# Altium PCB Drone_v1.0 - Copy.PcbDoc
Units mm, origin at the board's own origin, x right, y up, seen from the top; angles counter-clockwise.
Board outline 103.38 x 103.38 mm, 2 copper layers (Top Layer, Bottom Layer); 82 components, 54 nets, 266 pads, 76 vias.
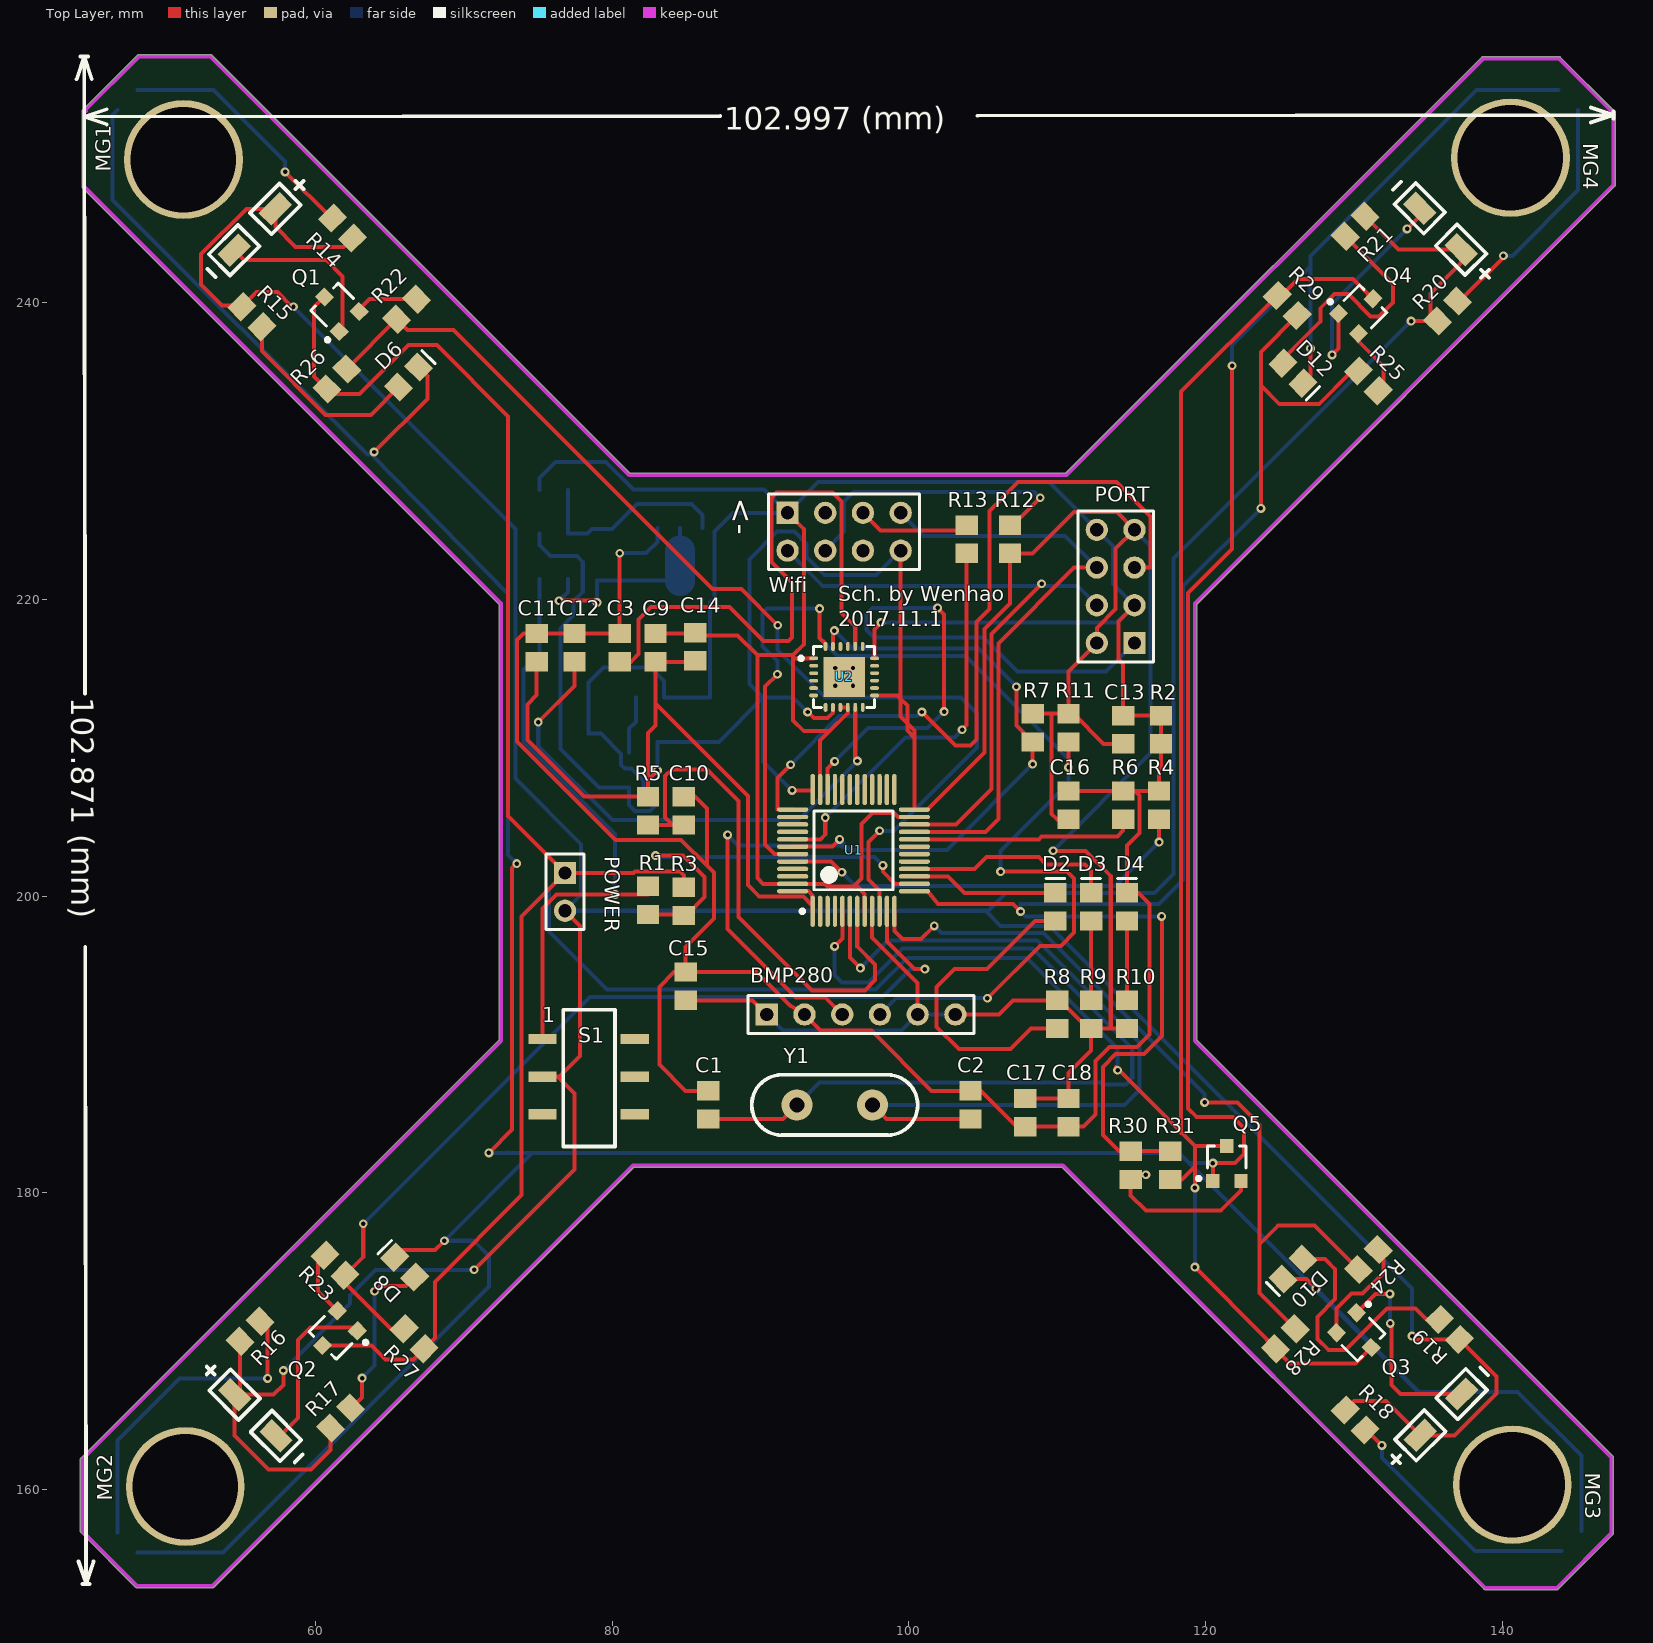
[diagram p0: Top Layer view]
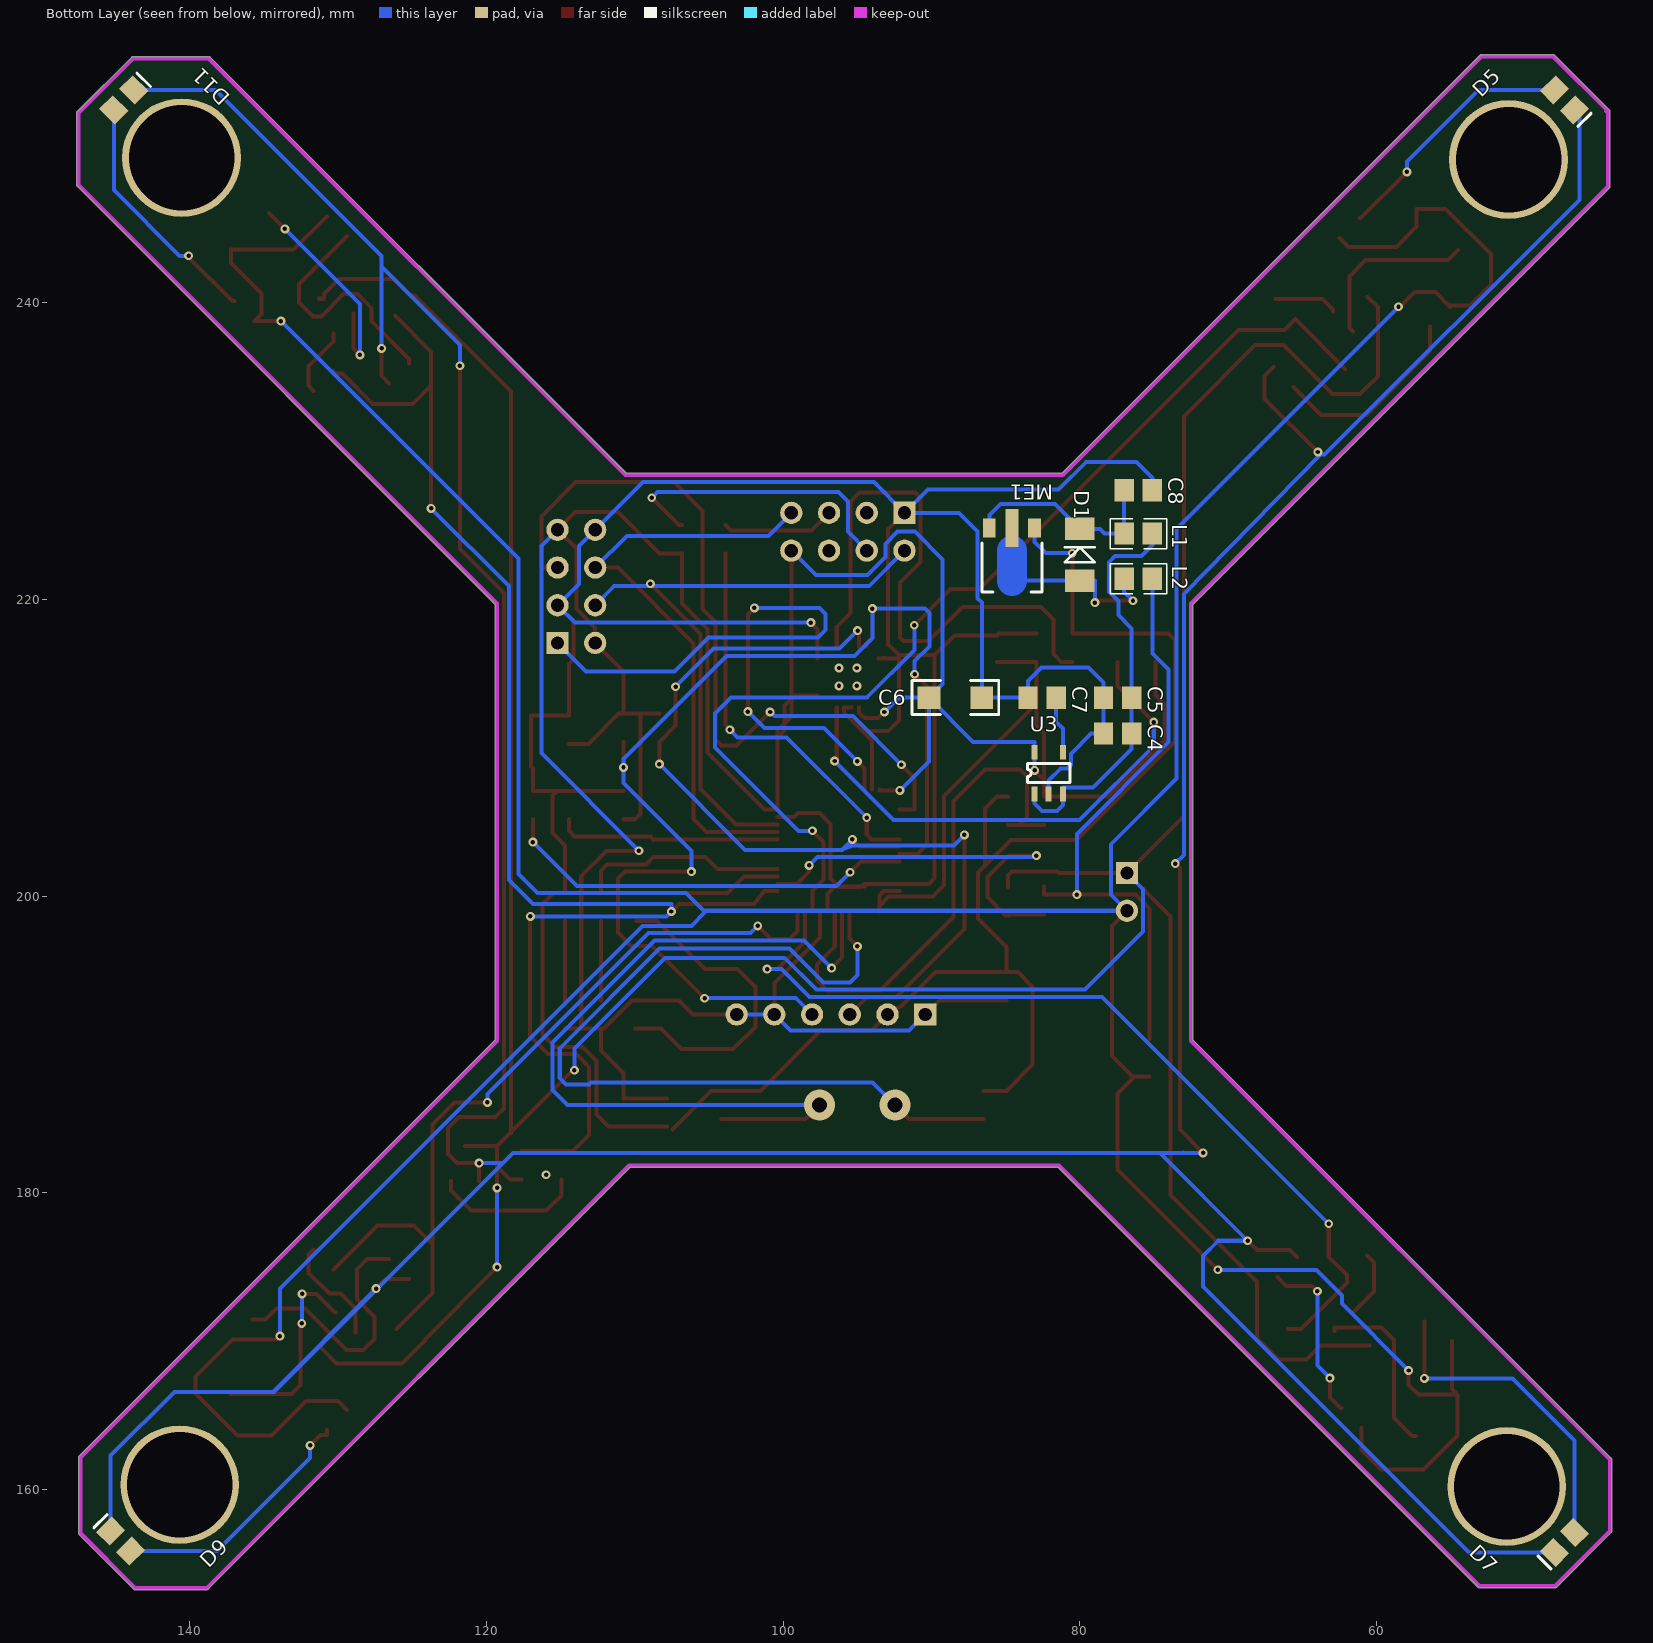
[diagram p1: Bottom Layer view, seen from below]

## Layer stack, top to bottom
Top Layer: signal copper 0.0356
Dielectric: dielectric 0.32, FR-4, Dk 4.8
Bottom Layer: signal copper 0.0356

## Board outline
47.916,153.453 44.233,157.136 44.233,157.135 cw(c44.323,157.226) 44.196,157.226 44.196,162.052 cw(c44.323,162.052) 44.233,162.143 44.233,162.142 72.39,190.299 72.39,219.657 44.36,247.687 44.36,247.686 cw(c44.45,247.777) 44.323,247.777 44.323,252.857 cw(c44.45,252.857) 44.36,252.948 44.36,252.947 48.043,256.63 48.042,256.63 cw(c48.133,256.54) 48.133,256.667 52.958,256.667 cw(c52.959,256.54) 53.049,256.63 81.206,228.473 110.564,228.473 138.594,256.503 138.593,256.503 cw(c138.684,256.413) 138.684,256.54 143.764,256.54 cw(c143.764,256.413) 143.855,256.503 143.854,256.503 147.537,252.82 147.537,252.821 cw(c147.447,252.73) 147.574,252.73 147.574,247.904 cw(c147.447,247.904) 147.537,247.813 147.537,247.814 119.38,219.657 119.38,190.299 147.41,162.269 147.41,162.27 cw(c147.32,162.179) 147.447,162.179 147.447,157.099 cw(c147.32,157.099) 147.41,157.008 147.41,157.009 143.727,153.326 143.728,153.326 cw(c143.637,153.416) 143.637,153.289 138.811,153.289 cw(c138.811,153.416) 138.721,153.326 110.31,181.737 81.46,181.737 53.176,153.453 53.177,153.453 cw(c53.086,153.543) 53.086,153.416 48.006,153.416 cw(c48.006,153.543)

## Design rules (kind name [scope] priority, off if disabled: settings)
Clearance [All] p1: gap=0.2
PolygonConnect [All] p1: connectstyle=Relief reliefconductorwidth=0.254 reliefentries=4 polygonreliefangle="90 Angle" airgapwidth=0.254
RoutingVias [All] p1: holewidth=0.711 width=1.27 viastyle="Through Hole" minholewidth=0.711 minwidth=1.27 maxholewidth=0.711 maxwidth=1.27
SolderMaskExpansion [All] p1: expansion=0.102
Width [All] p1: maxlimit=0.27 minlimit=0.27 preferedwidth=0.27 minimp=50.000000 maximp=50.000000 favimp=50.000000
28 further rules are at their usual default settings.

## Classes and differential pairs
component class Drone_v1.0: BMP280 C1 C2 C3 C4 C5 C6 C7 C8 C9 C10 C11 C12 C13 C14 D1 D2 D3 D4 D5 D6 D7 D8 D9 D10 Header L1 L2 ME1 MG1 MG2 MG3 MG4 P1 PORT PORT1 POWER Q1 Q2 Q3 Q4 Q5 R1 R2 R3 R4 R5 R6 R7 R8 R9 R10 R11 R12 R13 R14 R15 R16 R17 R18 R19 R20 R21 R22 R23 R24 R25 R26 R27 R28 S1 U1 U2 U3 Wifi Y1

## Components (designator, comment, footprint, x,y, rotation, side; value= is the part's Value field where it differs from the comment)
BMP280 "BMP280" HDR1X6 90.424,192.024 r0 top (schematic designator P1)
C1 "0402 12pF" 0805-2 86.487,185.928 r90 top
C2 "0402 12pF" 0805-2 104.14,185.928 r270 top
C3 "0402 12pF" 0805-2 80.518,216.728 r270 top
C4 "0402 12pF" 0805-2 77.47,210.947 r0 bottom
C5 "0402 12pF" 0805-2 77.47,213.36 r0 bottom
C6 "Cap Pol" 1206 88.392,213.36 r180 bottom
C7 "0402 12pF" 0805-2 82.55,213.36 r0 bottom
C8 "0402 12pF" 0805-2 76.073,227.33 r180 bottom
C9 "0402 12pF" 0805-2 82.931,216.728 r90 top
C10 "Cap" 0805-2 84.836,205.74 r90 top
C11 "0402 12pF" 0805-2 74.93,216.728 r90 top
C12 "0402 12pF" 0805-2 77.47,216.728 r90 top
C13 "Cap" 0805-2 114.427,211.201 r270 top
C14 "Cap" 0805-2 85.598,216.789 r270 top
C15 "Cap" 0805-2 84.963,193.929 r270 top
C16 "Cap" 0805-2 110.744,206.121 r270 top
C17 "0402 12pF" 0805-2 107.823,185.42 r270 top
C18 "0402 12pF" 0805-2 110.744,185.42 r270 top
D1 "Diode" DIODE-1206 80.01,221.234 r90 bottom
D2 "LED0" LED_0805 109.855,199.263 r90 top
D3 "LED0" LED_0805 112.268,199.263 r90 top
D4 "LED0" LED_0805 114.681,199.263 r90 top
D5 "LED0" LED_0805 47.371,253.619 r225 bottom
D6 "LED0" LED_0805 66.294,234.95 r45 top
D7 "LED0" LED_0805 47.371,156.464 r315 bottom
D8 "LED0" LED_0805 66.04,175.006 r135 top
D9 "LED0" LED_0805 144.617,156.555 r45 bottom
D10 "LED0" LED_0805 125.857,174.879 r225 top
D11 "LED0" LED_0805 144.399,253.619 r135 bottom
D12 "LED0" LED_0805 125.857,235.204 r315 top
L1 "Inductor" 0805-1 76.073,224.409 r180 bottom
L2 "Inductor" 0805-1 76.073,221.361 r180 bottom
ME1 "ME2108A" SOT-89 83.058,224.79 r0 bottom
MG1 "MOTOR AC" Motor 51.943,248.793 r315 top
MG2 "MOTOR AC" Motor 52.07,161.036 r45 top
MG3 "MOTOR AC" Motor 139.827,161.163 r135 top
MG4 "MOTOR AC" Motor 139.7,248.92 r225 top
PORT "PORT" HDR2X4_CEN 115.189,217.043 r90 top (schematic designator PORT1)
POWER "Header 2" HDR1X2 76.835,201.549 r270 top (schematic designator POWER1)
Q1 "SI2302" SOT-23 61.468,239.522 r45 top
Q2 "SI2302" SOT-23 61.341,170.561 r135 top
Q3 "SI2302" SOT-23 130.302,170.434 r225 top
Q4 "SI2302" SOT-23 130.429,239.395 r315 top
Q5 "MOSFET-N" SOT-23 121.412,181.991 r0 top
R1 "Res1" 0805-2 82.423,199.705 r90 top
R2 "Res1" 0805-2 116.967,211.201 r270 top
R3 "Res1" 0805-2 84.836,199.644 r90 top
R4 "Res1" 0805-2 116.84,206.121 r270 top
R5 "Res1" 0805-2 82.423,205.74 r90 top
R6 "Res1" 0805-2 114.427,206.121 r270 top
R7 "Res1" 0805-2 108.331,211.328 r270 top
R8 "Res1" 0805-2 109.982,192.024 r90 top
R9 "Res1" 0805-2 112.268,192.024 r270 top
R10 "Res1" 0805-2 114.681,192.024 r270 top
R11 "Res1" 0805-2 110.744,211.328 r270 top
R12 "Res1" 0805-2 106.807,224.028 r270 top
R13 "Res1" 0805-2 103.886,224.028 r90 top
R14 "Res1" 0805-2 61.849,244.983 r135 top
R15 "Res1" 0805-2 55.753,239.014 r315 top
R16 "Res1" 0805-2 55.626,170.688 r45 top
R17 "Res1" 0805-2 61.722,164.846 r45 top
R18 "Res1" 0805-2 130.048,164.719 r315 top
R19 "Res1" 0805-2 136.398,170.815 r135 top
R20 "Res1" 0805-2 136.271,239.395 r45 top
R21 "Res1" 0805-2 130.048,245.11 r225 top
R22 "Res1" 0805-2 66.167,239.522 r225 top
R23 "Res1" 0805-2 61.341,175.133 r315 top
R24 "Res1" 0805-2 130.937,175.514 r225 top
R25 "Res1" 0805-2 130.937,234.696 r135 top
R26 "Res1" 0805-2 61.468,234.823 r45 top
R27 "Res1" 0805-2 66.675,170.18 r135 top
R28 "Res1" 0805-2 125.349,170.18 r45 top
R29 "Res1" 0805-2 125.476,239.776 r315 top
R30 "Res1" 0805-2 114.935,181.864 r90 top
R31 "Res1" 0805-2 117.602,181.864 r90 top
S1 "Switch" 开关 76.708,183.134 r0 top
U1 "STM32F103C" LQFP-48_M 96.266,203.073 r90 top
U2 "MPU6050" QFN50P400X400X90-24N 95.631,214.757 r0 top
U3 "MIC5219" SOT25-5 83.058,206.883 r90 bottom
Wifi "ESP03" PCBComponent_1 91.821,223.266 r0 top (schematic designator Header1)
Y1 "Micro 3215" XTAL5 92.456,185.928 r0 top

## Footprints (in the part's own frame and the unit in brackets; to place one, negate y for a bottom-side part, rotate by r counter-clockwise, add the part's x,y. Pads: shape width x height; smd on the part's side, far side on the other; paste and mask are expansions set on the pad)
0805-1 [mm] "贴片带丝印"
  rect 1.3x1.5 smd: 1(-0.95,0) 2(0.95,0)
  silkscreen extent -1.91,-1.02 1.9,1.02, body extent -1.14,-0.51 1.14,0.51, height 1
0805-2 [mm] "贴片无丝印"
  rect 1.3x1.5 smd: 1(-0.95,0) 2(0.95,0)
1206 [mil] "贴片元件"
  rect 60x60 smd: 1(-70,0) 2(70,0)
  silkscreen extent -115,-45 115,45, body extent -75,-35 75,35, height 39
DIODE-1206 [mm] "玻璃封装二极管"
  rect 1.5x2 smd: 1(0,0) 2(3.5,0)
  silkscreen extent 1.25,-1 2.25,1
HDR1X2 [mm] "Connector; Header; 2 Position"
  rect 1.5x1.5 hole 0.9: 1(0,0)
  round 1.5 hole 0.9: 2(2.54,0)
  silkscreen extent -1.27,-1.27 3.81,1.27
HDR1X6 [mm] "Connector; Header; 6 Position"
  rect 1.5x1.5 hole 0.9: 1(0,0)
  round 1.5 hole 0.9: 2(2.54,0) 3(5.08,0) 4(7.62,0) 5(10.16,0) 6(12.7,0)
  silkscreen extent -1.27,-1.27 13.97,1.27
HDR2X4_CEN [mm] "Connector; Header; 4x2 Position"
  rect 1.5x1.5 hole 0.9: 1(0,0)
  round 1.5 hole 0.9: 2(2.54,0) 3(5.08,0) 4(7.62,0) 5(0,2.54) 6(2.54,2.54) 7(5.08,2.54) 8(7.62,2.54)
  silkscreen extent -1.27,-1.27 8.89,3.81
LED_0805 [mm] "贴片二极管"
  rect 1.3x1.5 smd: 1(-0.95,0) 2(0.95,0)
  silkscreen extent 1.91,-0.63 1.91,0.64
LQFP-48_M [mm] "Thin QFP, 48-Leads, Body 7x7mm, Pitch 0.5mm, IPC Low Density"
  oval 2.1x0.3 smd: 1(-4.1,2.75) 2(-4.1,2.25) 3(-4.1,1.75) 4(-4.1,1.25) 5(-4.1,0.75) 6(-4.1,0.25) 7(-4.1,-0.25) 8(-4.1,-0.75) 9(-4.1,-1.25) 10(-4.1,-1.75) 11(-4.1,-2.25) 12(-4.1,-2.75) 25(4.1,-2.75) 26(4.1,-2.25) 27(4.1,-1.75) 28(4.1,-1.25) 29(4.1,-0.75) 30(4.1,-0.25) 31(4.1,0.25) 32(4.1,0.75) 33(4.1,1.25) 34(4.1,1.75) 35(4.1,2.25) 36(4.1,2.75)
  oval 0.3x2.1 smd: 13(-2.75,-4.1) 14(-2.25,-4.1) 15(-1.75,-4.1) 16(-1.25,-4.1) 17(-0.75,-4.1) 18(-0.25,-4.1) 19(0.25,-4.1) 20(0.75,-4.1) 21(1.25,-4.1) 22(1.75,-4.1) 23(2.25,-4.1) 24(2.75,-4.1) 37(2.75,4.1) 38(2.25,4.1) 39(1.75,4.1) 40(1.25,4.1) 41(0.75,4.1) 42(0.25,4.1) 43(-0.25,4.1) 44(-0.75,4.1) 45(-1.25,4.1) 46(-1.75,4.1) 47(-2.25,4.1) 48(-2.75,4.1)
  silkscreen extent -4.22,-2.65 2.65,3.57, body extent -3.5,-3.5 3.5,3.5, height 1.6
Motor [mm]
  round 8 hole 7.1: 0(-1.143,0)
  rect 1.2x2 smd: 1(5.588,2.032) 2(5.588,-1.905)
  silkscreen extent 4.57,-4.06 6.6,4.7
PCBComponent_1 [mm]
  rect 1.5x1.5 hole 0.9: 1(0,2.54)
  round 1.5 hole 0.9: 2(2.54,2.54) 3(5.08,2.54) 4(7.62,2.54) 5(7.62,0) 6(5.08,0) 7(2.54,0) 8(0,0)
  silkscreen extent -1.27,-1.27 8.89,3.81
QFN50P400X400X90-24N [mm] "QFN, 24-Leads, Body 4.1x4.1mm (max), Pitch 0.50mm, IPC Medium Density"
  oval 0.6x0.25 smd: 1(-2.05,1.25) 2(-2.05,0.75) 3(-2.05,0.25) 4(-2.05,-0.25) 5(-2.05,-0.75) 6(-2.05,-1.25) 13(2.05,-1.25) 14(2.05,-0.75) 15(2.05,-0.25) 16(2.05,0.25) 17(2.05,0.75) 18(2.05,1.25)
  oval 0.25x0.6 smd: 7(-1.25,-2.05) 8(-0.75,-2.05) 9(-0.25,-2.05) 10(0.25,-2.05) 11(0.75,-2.05) 12(1.25,-2.05) 19(1.25,2.05) 20(0.75,2.05) 21(0.25,2.05) 22(-0.25,2.05) 23(-0.75,2.05) 24(-1.25,2.05)
  rect 2.8x2.7 smd: 25(0,0)
  silkscreen extent -3.02,-2.05 2.05,2.05, body extent -2.05,-2.05 2.05,2.05, height 0.9
SOT25-5 [mm]
  rect 1x0.4 smd: 1(0,0) 2(0,-0.95) 3(0,-1.9) 4(2.8,-1.9) 5(2.8,0)
  silkscreen extent 0.76,-2.38 2.03,0.48
SOT-23 [mm]
  rect 0.9x0.95 smd: 1(-0.95,-1.175) 2(0.95,-1.175) 3(0,1.175)
  silkscreen extent -2.03,-1.14 1.3,1.18
SOT-89 [mil]
  rect 34x50 smd: 1(0,0) 3(120,0)
  rect 34x100 smd: 2(60,0)
  Top Layer lines w80: 60,140 60,60
  silkscreen extent -20,40 140,170
XTAL5 [mm]
  round 2.1 hole 1: 1(0,0) 2(5.08,0)
  silkscreen extent -3.05,-2.03 8.13,2.03
开关 [mm]
  rect 1.9x0.7 smd: 1(-1.397,7.239) 2(-1.397,4.699) 3(-1.397,2.159) 4(4.826,7.239) 5(4.826,4.699) 6(4.826,2.159)
  silkscreen extent 0,0 3.5,9.2

## Part data
BMP280: library part "Header 6", "Header, 6-Pin"
C1 C2 C3 C4 C5 C7 C8 C9 C11 C12 C17 C18: library part Cap, "Capacitor"
C6: "极性电解电容"
C10 C13 C14 C15 C16: "无极性电容"
D1: "二极管"
D2 D3 D4 D5 D6 D7 D8 D9 D10 D11 D12: "发光二极管"
L1 L2: "电感"
PORT: library part "Header 4X2A", "Header, 4-Pin, Dual row"
POWER: "Header, 2-Pin"
Q1 Q2 Q3 Q4: library part MOSFET-N, "N-Channel MOSFET"
Q5: "N-Channel MOSFET"
R1 R2 R3 R4 R5 R6 R7 R8 R9 R10 R11 R12 R13 R14 R15 R16 R17 R18 R19 R20 R21 R22 R23 R24 R25 R26 R27 R28 R29 R30 R31: "贴片电阻"
S1: library part 双刀双柄开关
U1: "STM32单片机48引脚"
Wifi: library part Hearder
Y1: library part XTAL, "Crystal Oscillator"

## Via types
v1: diameter 0.6, hole 0.3, Top Layer to Bottom Layer, 72 vias
v2: diameter 0.6, hole 0.3, Top Layer to Bottom Layer, tented top, 4 vias

## Nets (pads, with @x,y where several pads share a name; then routed paths per layer and width w, separated by ;. In a path a pad name is that pad's centre, name@x,y a point inside that pad or via, vN(x,y) a via of type N, cw(c..) or ccw(c..) an arc to the next point about the centre after c; other vN are vias at no path point)
3V3: BMP280.1 BMP280.5 BMP280.6 C6.1 C9.1 C11.1 C13.2 C14.2 C15.2 C16.2 C17.1 C18.1 PORT.4 PORT.5 R5.2 R7.1 R8.2 R9.2 R10.2 R11.1 R12.2 U1.1 U1.9 U1.24 U1.36 U1.48 U2.8 U2.13 U3.5 Wifi.5 | length 268.7
  Top Layer w0.27: C11.1 74.93,213.543 74.295,212.908 74.295,210.51 78.115,206.69 R5.2 82.423,207.823 ; v1(83.058,208.458) 82.423,207.823 ; C15.2 89.469,192.979 BMP280.1 ; C14.2@85.598,215.778 C9.1 82.931,212.954 ; v1(92.126,207.112) 93.516,207.112 U1.36 ; U1.48 93.218,200.323 93.516,200.025 U1.1@93.516,199.339 ; v1(93.167,212.395) 93.587,211.975 94.512,211.975 94.881,212.344 U2.8 ; U1.1 U1.1@93.516,199.339 ; U1.9 97.516,197.195 100.584,194.127 BMP280.5 ; U2.13 99.218,213.507 99.441,213.284 ; Wifi.5 99.441,213.284 ; U1.24 U1.24@100.381,205.823 ; BMP280.6 106.07,192.024 107.02,192.974 R8.2 110.16,192.974 112.06,191.074 R9.2 ; C17.1 C18.1 110.744,188.087 112.268,189.611 R9.2 ; R7.1 R11.1 ; 109.601,212.278 109.601,205.537 109.967,205.171 C16.2 ; v1(109.703,203.048) 111.887,203.048 113.589,201.346 113.589,191.074 ; C13.2 113.091,210.251 111.064,212.278 R11.1 ; R10.2 113.589,191.074 ; 82.423,207.823 82.423,210.972 82.931,211.48 82.931,212.954 ; 82.931,212.954 89.154,206.731 89.154,200.736 89.916,199.974 92.881,199.974 U1.1@93.516,199.339 ; 99.441,213.284 99.441,212.085 99.893,211.633 ; 99.441,213.284 99.893,212.831 99.893,211.633 ; 99.893,211.633 99.893,211.145 100.381,210.658 ; 99.893,211.633 100.381,211.145 100.381,210.658 ; U1.24@100.381,205.823 100.381,210.658 ; U1.24@100.381,205.823 101.247,205.823 105.08,209.656 105.08,217.983 106.807,219.71 R12.2 108.331,223.078 111.11,225.857 113.995,225.857 PORT.4 113.919,223.393 113.919,219.319 112.649,218.049 PORT.5 110.744,215.138 R11.1 ; R9.2 113.589,191.074
  Bottom Layer w0.27: v1(83.058,208.458) U3.5 83.058,210.388 87.198,210.388 C6.1 ; BMP280.1 91.509,190.939 99.499,190.939 BMP280.5 BMP280.6 ; v1(92.126,207.112) 90.17,209.067 C6.1 ; v1(93.167,212.395) 92.202,213.36 C6.1 ; Wifi.5 97.79,221.615 94.31,221.615 93.091,222.834 93.091,223.723 92.278,224.536 91.11,224.536 89.251,222.677 89.251,214.279 C6.1 ; v1(109.703,203.048) 116.281,209.626 116.281,223.571 PORT.4
AGND: POWER.1 Q1.3 Q2.3 Q3.3 Q4.3 Q5.3 R3.2 R26.1 R27.1 R28.1 R29.1 R31.1 | length 258.1
  Top Layer w0.27: Q2.3 63.805,169.73 64.752,168.783 66.621,168.783 R27.1 68.072,170.234 68.072,174.015 73.914,179.857 73.914,198.628 POWER.1 ; Q1.3 59.944,239.66 59.944,235.004 R26.1 61.141,233.807 62.992,233.807 66.294,237.109 68.199,237.109 73,232.308 73,205.384 POWER.1 ; R3.2 84.836,201.397 84.582,201.651 81.534,201.651 81.432,201.549 POWER.1 ; v1@113.948,188.471 119.253,183.166 ; R31.1 118.379,180.914 119.253,181.788 ; 118.321,184.055 118.321,233.964 R29.1 125.097,240.448 126.203,241.554 129.911,241.554 130.927,240.538 130.927,240.226 Q4.3 ; v1(119.253,175.006) 124.124,170.135 124.124,170.061 R28.1 125.657,168.529 130.059,168.529 Q3.3 ; v1(119.253,180.34) 119.253,181.788 ; Q5.3 119.253,183.166 ; 119.253,181.788 119.253,183.166
  Bottom Layer w0.27: POWER.1 75.743,200.457 75.743,197.612 79.647,193.708 97.758,193.708 99.884,195.834 107.95,195.834 114.046,189.738 v1(114.046,188.265) ; v1(119.253,175.006) v1(119.253,180.34)
BAT: MG1.1 MG2.1 MG3.1 MG4.1 POWER.2 R14.1 R15.1 R16.1 R17.1 R18.1 R19.1 R20.1 R21.1 S1.2 | length 302.1
  Top Layer w0.27: R16.1 54.954,166.794 MG2.1 ; R15.1 56.061,240.665 57.477,240.665 58.457,239.686 v1(58.547,239.686) ; R15.1@55.118,239.776 53.746,239.776 52.324,241.198 52.324,243.23 55.372,246.279 MG1.1 57.331,245.08 58.698,243.713 61.922,243.713 R14.1 ; v1(57.861,168.046) 57.861,167.081 57.204,166.424 MG2.1 ; R17.1 61.05,162.701 59.741,161.392 56.871,161.392 54.584,163.678 MG2.1 ; v1(70.714,174.828) 77.47,181.585 77.47,186.69 76.327,187.833 S1.2 ; 76.454,187.833 77.851,189.23 77.851,197.993 POWER.2 ; R18.1 129.975,165.989 132.127,165.989 MG3.1 136.753,163.677 139.573,166.497 139.573,167.64 R19.1 134.098,170.143 v1(133.883,170.358) ; R21.1 132.97,243.532 MG4.1 137.186,242.646 135.128,240.589 135.128,239.195 R20.1 v1(133.821,238.723)
  Bottom Layer w0.27: v1(57.861,168.046) 62.357,172.542 62.357,173.101 64.084,174.828 v1(70.714,174.828) ; v1(58.547,239.686) 73.508,224.725 73.508,207.901 77.927,203.481 77.927,200.101 POWER.2 105.337,199.009 ; v1(133.821,238.723) 117.831,222.733 117.831,201.487 116.543,200.199 106.528,200.199 105.247,198.918 106.177,197.988 109.479,197.988 133.883,173.584 v1(133.883,170.358)
GND: BMP280.2 C1.2 C2.1 C3.1 C4.2 C5.2 C6.2 C7.2 C8.2 C9.2 C10.2 C11.2 C12.2 C13.1 C14.1 C15.1 C16.1 C17.2 C18.2 D4.2 ME1.1 PORT.2 PORT.8 R2.1 R2.2 R4.1 R6.1 U1.8 U1.23 U1.35 U1.47 U2.1 U2.9 U2.10 U2.18 U3.2 Wifi.1 | length 319.7
  Top Layer w0.27: v1(80.518,223.088) C3.1 C12.2 C11.2 74.041,217.678 73.592,217.229 73.592,210.42 80.227,203.784 84.656,203.784 86.391,202.049 ; C9.2 C14.1@85.471,217.678 ; C10.2 85.598,206.69 86.391,205.897 86.391,202.049 ; C14.1@85.598,217.551 88.458,217.551 89.789,216.22 ; C1.2 84.953,186.878 83.185,188.646 83.185,193.878 84.186,194.879 C15.1 ; Wifi.1 92.913,224.714 92.913,216.941 92.192,216.22 89.789,216.22 ; 92.177,216.007 U2.1 93.218,216.023 ; 92.177,216.205 92.177,211.836 92.913,211.099 94.636,211.099 ; U1.35 94.016,210.479 94.636,211.099 ; U2.9 U2.10 95.881,212.344 94.636,211.099 ; U1.8 97.016,200.152 96.538,200.63 96.261,200.63 ; U2.18 97.663,216.007 97.663,217.957 v1(98.12,218.415) ; U1.23 99.246,205.323 98.981,205.588 97.536,205.588 96.799,204.851 96.799,201.168 96.261,200.63 ; C17.2@107.442,184.277 104.841,186.878 C2.1 101.524,186.878 97.47,190.932 94.056,190.932 BMP280.2 91.979,192.629 89.729,194.879 C15.1 ; C17.2 C18.2 111.76,184.47 112.568,185.278 112.568,188.895 113.505,189.832 115.359,189.832 116.205,190.678 116.205,199.466 115.458,200.213 D4.2 114.681,203.413 115.519,204.251 115.519,206.756 115.204,207.071 ; C16.1 112.573,207.071 R6.1 115.204,207.071 ; PORT.2 114.097,218.491 114.097,215.951 114.427,215.621 C13.1 115.672,212.151 R2.1 R2.2 116.967,208.712 116.84,208.585 R4.1 115.204,207.071 ; C15.1 84.963,196.571 86.868,198.476 86.868,201.572 86.391,202.049 ; 89.789,216.22 89.789,201.204 90.17,200.823 U1.47 94.315,200.823 ; 94.315,200.823 94.513,200.823 94.707,200.63 ; 94.315,200.823 94.509,200.63 94.707,200.63 ; 94.707,200.63 96.261,200.63 ; 94.707,200.63 94.727,200.609 96.241,200.609 96.261,200.63
  Bottom Layer w0.27: C8.2 75.123,228.158 76.2,229.235 79.578,229.235 81.432,227.381 90.246,227.381 Wifi.1 ; v1(80.518,223.088) 82.296,223.088 83.058,223.85 ME1.1 ; U3.2 82.108,207.772 81.295,208.585 80.874,208.585 80.62,208.839 80.62,209.575 79.248,210.947 C4.2 C5.2 78.42,214.376 79.436,215.392 82.601,215.392 83.5,214.493 C7.2 C6.2 86.614,219.761 86.893,220.04 86.893,224.536 88.163,225.806 Wifi.1 ; v1(98.12,218.415) 114.021,218.415 PORT.2 113.741,221.031 113.741,223.571 PORT.8 109.444,227.868 93.883,227.868 Wifi.1
KEY: R13.1 U1.41 | length 27.1
  Top Layer w0.27: U1.41 94.031,203.823 94.361,204.153 v1(94.361,205.283) ; v1(103.581,211.201) 103.886,211.506 R13.1
  Bottom Layer w0.27: v1(94.361,205.283) 99.754,210.675 103.056,210.675 v1(103.581,211.201)
LED1: D2.2 U1.15 | length 9.9
  Top Layer w0.27: U1.15 102.616,201.323 103.726,200.213 D2.2
LED2: D3.2 U1.16 | length 14.1
  Top Layer w0.27: U1.16 104.414,201.823 105.212,202.621 108.74,202.621 109.24,202.121 111.849,202.121 112.268,201.701 D3.2
LED_EN: U1.45
NetC3_2: C3.2 U2.20 | length 40.8
  Top Layer w0.27: C3.2 81.28,215.778 81.788,216.286 81.788,218.618 82.626,219.456 87.905,219.456 90.191,217.17 91.877,217.17 92.131,217.424 92.131,221.102 90.729,222.504 90.729,226.822 91.084,227.178 94.844,227.178 95.453,226.568 95.453,219.063 96.381,218.135 U2.20
NetC4_1: C4.1 C5.1 L1.2 U3.1 U3.3 | length 27.2
  Bottom Layer w0.27: L1.2 75.123,223.632 75.87,222.885 77.648,222.885 78.029,222.504 78.029,220.472 77.419,219.862 77.419,218.918 76.52,218.019 C5.1 C4.1 76.52,209.911 79.129,207.302 81.158,207.302 U3.3 81.158,206.116 81.534,205.74 82.55,205.74 83.058,206.248 U3.1
NetC7_1: C7.1 U3.4 | length 3.9
  Bottom Layer w0.27: U3.4 81.158,211.277 81.6,211.719 C7.1
NetC8_1: C8.1 D1.2 L1.1 ME1.3 | length 14
  Bottom Layer w0.27: C8.1 L1.1 78.334,224.409 78.659,224.734 D1.2 81.692,226.416 85.344,226.416 86.106,225.654 ME1.3
NetC12_1: C12.1 U2.11 | length 35.5
  Top Layer w0.27: v1(75.032,211.709) 77.47,214.147 C12.1 ; U2.11 96.381,209.232 v1(96.52,209.093)
  Bottom Layer w0.27: v1(75.032,211.709) 75.032,210.12 80.021,205.13 92.558,205.13 v1(96.52,209.093)
NetD1_1: D1.1 L2.1 ME1.2 | length 12.9
  Top Layer w0.27: v1(76.429,219.888) 78.867,219.888 v1(78.994,219.761)
  Bottom Layer w0.27: v1(76.429,219.888) 77.023,220.482 L2.1 ; v1(78.994,219.761) 78.994,221.234 D1.1 84.582,221.234 ; 84.582,223.266 ME1.2
NetD2_1: D2.1 R8.1 | length 21.9
  Top Layer w0.27: D2.1 108.488,198.313 105.247,195.072 103.053,195.072 101.854,193.873 101.854,191.186 103.353,189.687 106.832,189.687 108.219,191.074 R8.1
NetD3_1: D3.1 R9.1 | length 5.3
  Top Layer w0.27: R9.1 D3.1
NetD4_1: D4.1 R10.1 | length 5.3
  Top Layer w0.27: R10.1 D4.1
NetD5_1: D5.1 R14.2 | length 17.1
  Top Layer w0.27: v1(57.988,248.773) 61.107,245.655 R14.2
  Bottom Layer w0.27: D5.1 53.176,254.291 57.988,249.479 v1(57.988,248.773)
NetD5_2: D5.2 D6.2 D7.2 D8.2 D9.2 D10.2 D11.2 D12.2 Q5.1 | length 339.6
  Top Layer w0.27: v1(63.979,229.904) 67.564,233.489 67.564,235.024 D6.2 ; D8.2 65.839,176.149 68.072,176.149 v1(68.707,176.784) ; v1(71.704,182.702) 73.279,184.277 73.279,201.879 v1(73.585,202.185) ; Q5.1 v1(120.462,182.016) 121.945,182.016 122.555,182.626 122.555,184.379 121.818,185.115 119.38,185.115 118.791,185.704 118.791,220.396 121.768,223.372 v1(121.768,235.712) ; D10.2 126.757,174.207 v1(127.406,173.558) ; D12.2 127.037,235.04 v1(127.037,236.881)
  Bottom Layer w0.27: D5.2 46.355,252.603 46.355,246.888 63.516,229.727 63.799,229.727 73,220.334 73,202.77 v1(73.585,202.185) ; D7.2 53.786,155.792 71.704,173.711 71.704,175.768 70.688,176.784 v1(68.707,176.784) 74.625,182.702 ; v1(71.704,182.702) 73.025,182.702 ; 73.05,182.728 73.025,182.702 ; v1(120.462,182.016) 118.872,182.016 ; v1(121.768,235.712) 121.768,237.118 127.037,242.387 ; v1(127.037,236.881) 127.037,243.115 138.213,254.291 D11.2 ; v1(127.406,173.558) 134.366,166.599 ; D9.2 145.288,162.306 140.995,166.599 134.366,166.599 ; 73.025,182.702 74.625,182.702 ; 74.625,182.702 118.186,182.702 118.872,182.016 ; 118.872,182.016 134.29,166.599 134.366,166.599
NetD6_1: D6.1 R15.2 | length 13.4
  Top Layer w0.27: R15.2 56.425,236.691 60.706,232.41 63.754,232.41 D6.1
NetD7_1: D7.1 R16.2 | length 21.9
  Top Layer w0.27: v1(56.806,167.513) R16.2@56.806,171.36
  Bottom Layer w0.27: D7.1 46.699,163.336 50.876,167.513 v1(56.806,167.513)
NetD8_1: D8.1 R17.2 | length 11.7
  Top Layer w0.27: R17.2 62.464,165.518 63.17,166.223 v1(63.17,167.538) ; v1(64.008,173.38) 64.364,173.736 66.114,173.736 D8.1
  Bottom Layer w0.27: v1(63.17,167.538) 64.008,168.377 v1(64.008,173.38)
NetD9_1: D9.1 R18.2 | length 17.3
  Top Layer w0.27: R18.2 130.72,163.703 131.156,163.703 v1(131.851,163.008)
  Bottom Layer w0.27: v1(131.851,163.008) 131.851,162.154 138.122,155.883 D9.1
NetD10_1: D10.1 R19.2 | length 17.6
  Top Layer w0.27: D10.1 128.016,175.551 128.702,174.865 128.702,172.847 127.508,171.653 127.508,170.18 128.27,169.418 129.413,169.418 132.207,172.212 134.128,172.212 134.853,171.487 R19.2
NetD11_1: D11.1 R20.2 | length 16.7
  Top Layer w0.27: R20.2 137.084,240.067 140.03,243.013 v1(140.03,243.12)
  Bottom Layer w0.27: v1(140.03,243.12) 140.631,243.12 145.071,247.56 D11.1
NetD12_1: D12.1 R21.2 | length 16.8
  Top Layer w0.27: D12.1 125.185,236.183 127.698,238.696 127.698,239.585 128.651,240.538 129.594,240.538 131.092,239.039 131.648,239.039 132.588,239.979 132.588,241.227 R21.2
NetHeader1_3: R13.2 Wifi.3 | length 7.6
  Top Layer w0.27: Wifi.3 98.095,224.612 103.52,224.612 R13.2
NetHeader1_7: R12.1 Wifi.7 | length 20.3
  Top Layer w0.27: R12.1 106.995,224.978 v1(108.839,226.822)
  Bottom Layer w0.27: Wifi.7 95.631,224.536 95.631,226.568 96.266,227.203 108.458,227.203 v1(108.839,226.822)
NetMG1_2: MG1.2 Q1.1 | length 11.8
  Top Layer w0.27: MG1.2 55.218,242.824 60.764,242.824 61.849,241.739 61.849,238.241 Q1.1
NetMG2_2: MG2.2 Q2.1 | length 11.8
  Top Layer w0.27: MG2.2 57.651,163.64 58.852,164.841 58.852,170.104 59.69,170.942 62.844,170.942 Q2.1
NetMG3_2: MG3.2 Q3.1 | length 13.9
  Top Layer w0.27: Q3.1 130.161,171.937 131.427,173.203 v1(132.385,173.203) ; v1(132.41,171.221) 132.486,171.145 132.486,167.071 133.096,166.461 MG3.2
  Bottom Layer w0.27: v1(132.385,173.203) 132.41,173.177 v1(132.41,171.221)
NetMG4_2: MG4.2 Q4.1 | length 15.1
  Top Layer w0.27: v1(128.499,236.445) 128.926,236.872 Q4.1 ; v1(133.553,244.932) MG4.2@134.62,245.999
  Bottom Layer w0.27: v1(128.499,236.445) 128.499,239.878 v1(133.553,244.932)
NetQ1_2: Q1.2 R22.1 | length 4.3
  Top Layer w0.27: Q1.2 62.971,239.495 63.669,240.194 R22.1
NetQ2_2: Q2.2 R23.1 | length 4.5
  Top Layer w0.27: R23.1 60.198,175.333 60.198,173.366 Q2.2
NetQ3_2: Q3.2 R24.1 | length 7.5
  Top Layer w0.27: Q3.2 128.799,172.212 129.815,173.228 130.556,173.228 131.953,174.625 131.953,175.841 R24.1
NetQ4_2: Q4.2 R25.1 | length 4.7
  Top Layer w0.27: Q4.2 130.27,237.363 131.953,235.68 131.953,234.369 R25.1
NetQ5_2: Q5.2 R30.1 | length 10.1
  Top Layer w0.27: R30.1 114.935,179.832 115.951,178.816 120.997,178.816 122.362,180.181 Q5.2
  other v1: 115.951,181.229
NetR1_1: R1.1 R3.1 U1.14 | length 28
  Top Layer w0.27: R1.1 R3.1@84.836,198.755 ; v1(82.931,202.717) 84.783,202.717 86.233,201.267 86.233,199.923 85.004,198.694 R3.1 ; v1(98.247,202.062) 98.247,201.636 99.06,200.823 U1.14
  Bottom Layer w0.27: v1(82.931,202.717) 83.008,202.64 97.669,202.64 v1(98.247,202.062)
NetR4_2: R4.2 U1.44 | length 28.1
  Top Layer w0.27: U1.44 94.755,202.323 v1(95.479,201.6) ; v1(116.84,203.632) R4.2
  Bottom Layer w0.27: v1(95.479,201.6) 96.409,200.669 113.877,200.669 v1(116.84,203.632)
NetR6_2: R6.2 U1.20 | length 15.1
  Top Layer w0.27: U1.20 108.74,203.823 108.935,204.018 114.046,204.018 114.427,204.399 R6.2
OSC1: C1.1 U1.5 Y1.1 | length 60.3
  Top Layer w0.27: C1.1 91.506,184.978 Y1.1 ; v1(94.996,196.613) 95.516,197.133 U1.5
  Bottom Layer w0.27: Y1.1 93.98,187.452 112.919,187.452 113.076,187.295 114.602,187.295 115.037,187.73 115.037,189.738 108.306,196.469 99.554,196.469 97.263,194.178 95.504,194.178 94.996,194.686 v1(94.996,196.613)
OSC2: C2.2 U1.6 Y1.2 | length 55.1
  Top Layer w0.27: U1.6 96.016,195.855 v1(96.723,195.148) ; Y1.2 98.486,184.978 C2.2
  Bottom Layer w0.27: v1(96.723,195.148) 98.582,197.007 108.659,197.007 115.519,190.147 115.519,186.944 114.503,185.928 Y1.2
PWM1: R22.2 R26.2 U1.10 | length 73
  Top Layer w0.27: R26.2 R22.2 66.221,238.125 69.331,238.125 86.78,220.675 88.722,220.675 v1(91.161,218.237) ; U1.10 98.016,200.378 97.277,201.117 97.277,203.652 v1(98.019,204.394)
  Bottom Layer w0.27: v1(91.161,218.237) 91.161,216.56 94.361,213.36 103.505,213.36 104.572,212.293 104.572,210.012 98.954,204.394 v1(98.019,204.394)
PWM2: R23.2 R27.2 U1.11 | length 60
  Top Layer w0.27: v1(63.246,177.927) 63.246,175.695 R23.2 62.013,173.953 65.114,170.852 R27.2 ; U1.11 98.516,196.939 100.383,195.072 v1(101.067,195.072)
  Bottom Layer w0.27: v1(63.246,177.927) 78.519,193.2 98.23,193.2 100.101,195.072 v1(101.067,195.072)
PWM3: R24.2 R28.2 U1.12 | length 55.5
  Top Layer w0.27: U1.12 99.016,197.656 99.568,197.104 100.813,197.104 v1(101.702,197.993) ; v1(119.913,186.106) 122.123,186.106 123.617,184.612 123.617,176.548 ; R28.2 123.617,173.255 123.617,176.548 ; R24.2 127.308,177.8 124.869,177.8 123.617,176.548
  Bottom Layer w0.27: v1(101.702,197.993) 102.176,197.518 109.06,197.518 119.913,186.665 v1(119.913,186.106)
PWM4: R25.2 R29.2 R30.2 R31.2 U1.13 | length 101.4
  Top Layer w0.27: U1.13 101.27,200.323 101.956,199.466 107.01,199.466 v1(107.518,198.958) ; v1(117.018,198.628) 117.043,198.603 117.043,190.576 115.824,189.357 113.919,189.357 113.055,188.493 113.055,183.896 114.137,182.814 R30.2 R31.2 ; v1(123.698,226.111) 123.698,234.391 ; R29.2 123.698,236.655 123.698,234.391 ; R25.2 130.265,235.179 129.667,235.179 127.61,233.121 124.968,233.121 123.698,234.391
  Bottom Layer w0.27: v1(117.018,198.628) 107.848,198.628 v1(107.518,198.958) 107.518,199.466 116.84,199.466 118.466,201.092 118.466,220.878 v1(123.698,226.111)
RST: C10.1 R5.1 U1.7 | length 36.4
  Top Layer w0.27: R5.1 84.074,204.79 ; C10.1 84.074,204.79 ; U1.7 96.516,196.6 97.714,195.402 97.714,194.335 97.028,193.65 93.472,193.65 88.519,198.603 88.519,206.4 86.385,208.534 84.032,208.534 83.566,208.068 83.566,205.298 84.074,204.79
SCL: BMP280.3 R7.2 U1.42 U2.23 | length 64.7
  Top Layer w0.27: v1(87.782,204.114) 87.782,197.79 92.405,193.167 94.361,193.167 BMP280.3 ; U1.42 94.84,203.323 v1(95.326,203.81) ; U2.23 94.881,217.792 v1(94.971,217.881) ; v1(107.239,214.097) 107.239,211.47 R7.2 v1(108.331,208.89)
  Bottom Layer w0.27: v1(87.782,204.114) 88.494,203.403 95.326,203.403 96.022,203.114 ; v1(94.971,217.881) 96.19,216.662 104.673,216.662 v1(107.239,214.097) ; v1(95.326,203.81) 96.022,203.114 ; v1(108.331,208.89) 102.555,203.114 96.022,203.114
SDA: BMP280.4 R11.2 U1.43 U2.24 | length 82.6
  Top Layer w0.27: v1(91.135,214.935) 90.297,214.097 90.297,203.458 90.932,202.823 U1.43 ; v1(93.98,219.354) 93.98,217.393 94.381,216.992 U2.24 ; v1(105.283,193.116) 108.814,196.647 110.236,196.647 111.125,197.536 111.125,201.168 110.642,201.651 v1(106.172,201.651) ; v1(110.744,208.661) R11.2
  Bottom Layer w0.27: v1(91.135,214.935) 91.135,215.815 90.145,216.806 90.145,219.075 90.424,219.354 v1(93.98,219.354) 93.98,217.375 95.201,216.154 103.81,216.154 110.744,209.22 v1(110.744,208.661) 110.744,207.62 106.172,203.048 v1(106.172,201.651) ; BMP280.4 99.136,193.116 v1(105.283,193.116)
SWCLK: PORT.3 U1.37 | length 52.4
  Top Layer w0.27: v1(92.024,208.839) 91.135,207.95 91.135,205.823 U1.37 ; v1(100.863,212.395) 103.133,210.126 104.14,210.126 104.551,210.537 104.551,218.47 105.41,219.329 105.41,225.933 107.345,227.868 113.965,227.868 116.281,225.552 116.281,222.123 PORT.3
  Bottom Layer w0.27: v1(92.024,208.839) 95.301,212.115 100.584,212.115 v1(100.863,212.395)
SWDIO: PORT.1 U1.34 | length 44.1
  Top Layer w0.27: U1.34 94.516,208.587 v1(94.996,209.067) ; v1(101.93,219.405) 102.362,218.973 v1(102.362,212.42)
  Bottom Layer w0.27: v1(94.996,209.067) 97.231,211.303 101.244,211.303 v1(102.362,212.42) ; v1(101.93,219.405) 97.536,219.405 97.13,218.999 97.13,217.932 97.638,217.424 105.029,217.424 107.315,215.138 113.284,215.138 PORT.1
USART3_RX: PORT.6 U1.22 Wifi.8 | length 43.9
  Top Layer w0.27: U1.22 103.175,204.823 105.55,207.198 105.55,217.653 v1(108.928,221.031)
  Bottom Layer w0.27: Wifi.8 94.223,220.864 v1@108.928,220.864 ; v1(108.928,221.031) v1@108.928,220.864 ; PORT.6 111.368,220.864 v1@108.928,220.864
USART3_TX: PORT.7 U1.21 Wifi.4 | length 41.3
  Top Layer w0.27: U1.21 105.156,204.323 106.02,205.187 106.02,217.018 111.125,222.123 PORT.7
  Bottom Layer w0.27: Wifi.4 100.99,224.257 110.515,224.257 PORT.7
VCC: L2.2 R1.2 S1.1 | length 41.1
  Top Layer w0.27: S1.1 75.311,199.161 76.251,200.101 v1(80.213,200.101) 82.423,200.101 R1.2
  Bottom Layer w0.27: L2.2 75.123,216.347 74.041,215.265 74.041,210.363 80.213,204.191 v1(80.213,200.101)
pads on no net: MG1.0 MG2.0 MG3.0 MG4.0 S1.3 S1.4 S1.5 S1.6 U1.2 U1.3 U1.4 U1.17 U1.18 U1.19 U1.25 U1.26 U1.27 U1.28 U1.29 U1.30 U1.31 U1.32 U1.33 U1.38 U1.39 U1.40 U1.46 U2.2 U2.3 U2.4 U2.5 U2.6 U2.7 U2.12 U2.14 U2.15 U2.16 U2.17 U2.19 U2.21 U2.22 U2.25 Wifi.2 Wifi.6
copper on no net:
  other v2: 95.031,214.157 96.231,214.157 95.031,215.357 96.231,215.357

## Keep-outs
Keep-Out Layer:
  lines w0.254: 44.577,252.857 44.45,252.857 ; 44.45,252.857 48.133,256.54 52.959,256.54 81.153,228.346 110.617,228.346 138.684,256.413 143.764,256.413 147.447,252.73 147.447,247.904 119.253,219.71 119.253,190.246 147.32,162.179 147.32,157.099 143.637,153.416 138.811,153.416 110.363,181.864 81.407,181.864 53.086,153.543 48.006,153.543 44.323,157.226 44.323,162.052 72.517,190.246 72.517,219.71 44.45,247.777 44.45,252.857

## Silkscreen, mask and mechanical layers (free items; w line width, h text height)
Top Overlay:
  lines w0.254: 43.942,255.016 44.448,256.541 ; 44.067,155.193 44.577,153.67 ; 44.194,256.54 44.702,256.541 ; 44.323,153.67 44.831,153.67 ; 44.45,252.222 44.45,252.73 ; 44.502,213.637 44.448,256.541 ; 44.523,196.574 44.577,153.67 ; 44.958,255.017 44.448,256.541 ; 45.083,155.195 44.577,153.67 ; 45.975,251.97 44.45,252.476 ; 45.973,252.986 44.45,252.476 ; 87.29,252.529 44.45,252.476 ; 104.607,252.55 147.447,252.603 ; 145.922,253.109 147.447,252.603 ; 145.923,252.093 147.447,252.603 ; 147.447,252.349 147.446,252.857
  text "102.997 (mm)" at 87.545,251.615 h1.52 r0.07
  text "<-" at 88.011,226.822 h1.52 r270
  text "Sch. by Wenhao" at 95.25,219.837 h1
  text "2017.11.1" at 95.25,218.186 h1
  text "102.871 (mm)" at 43.588,213.382 h1.52 r270.07

## Text inside footprints (layer, text, board x,y; h text height)
S1: Top Overlay "1" at 75.311,191.516 h1